# Altium PCB NetTieLibSample.PcbDoc
Units mm, origin at the board's own origin, x right, y up, seen from the top; angles counter-clockwise.
Board outline 97.5 x 65 mm, 6 copper layers (Top Layer, MidLayer1, MidLayer2, MidLayer3, MidLayer4, Bottom Layer); 20 components, 22 nets, 56 pads, 0 vias.
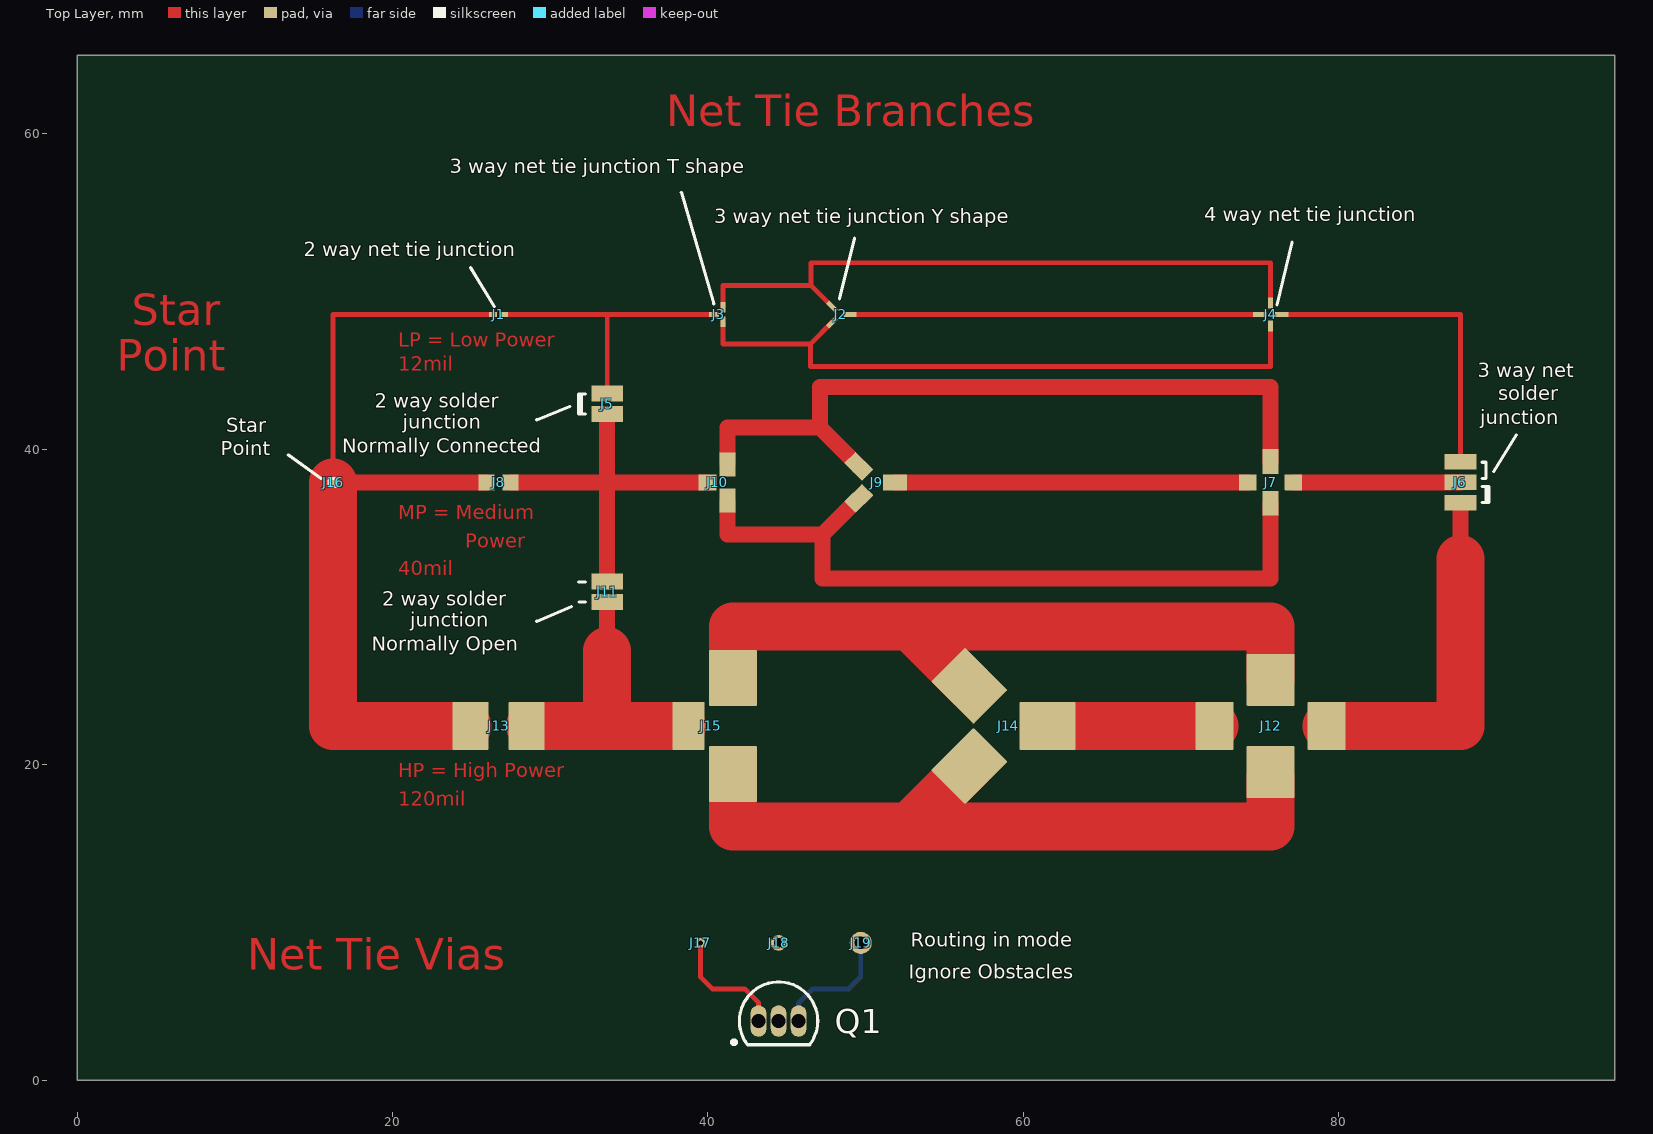
[diagram p0: Top Layer view]
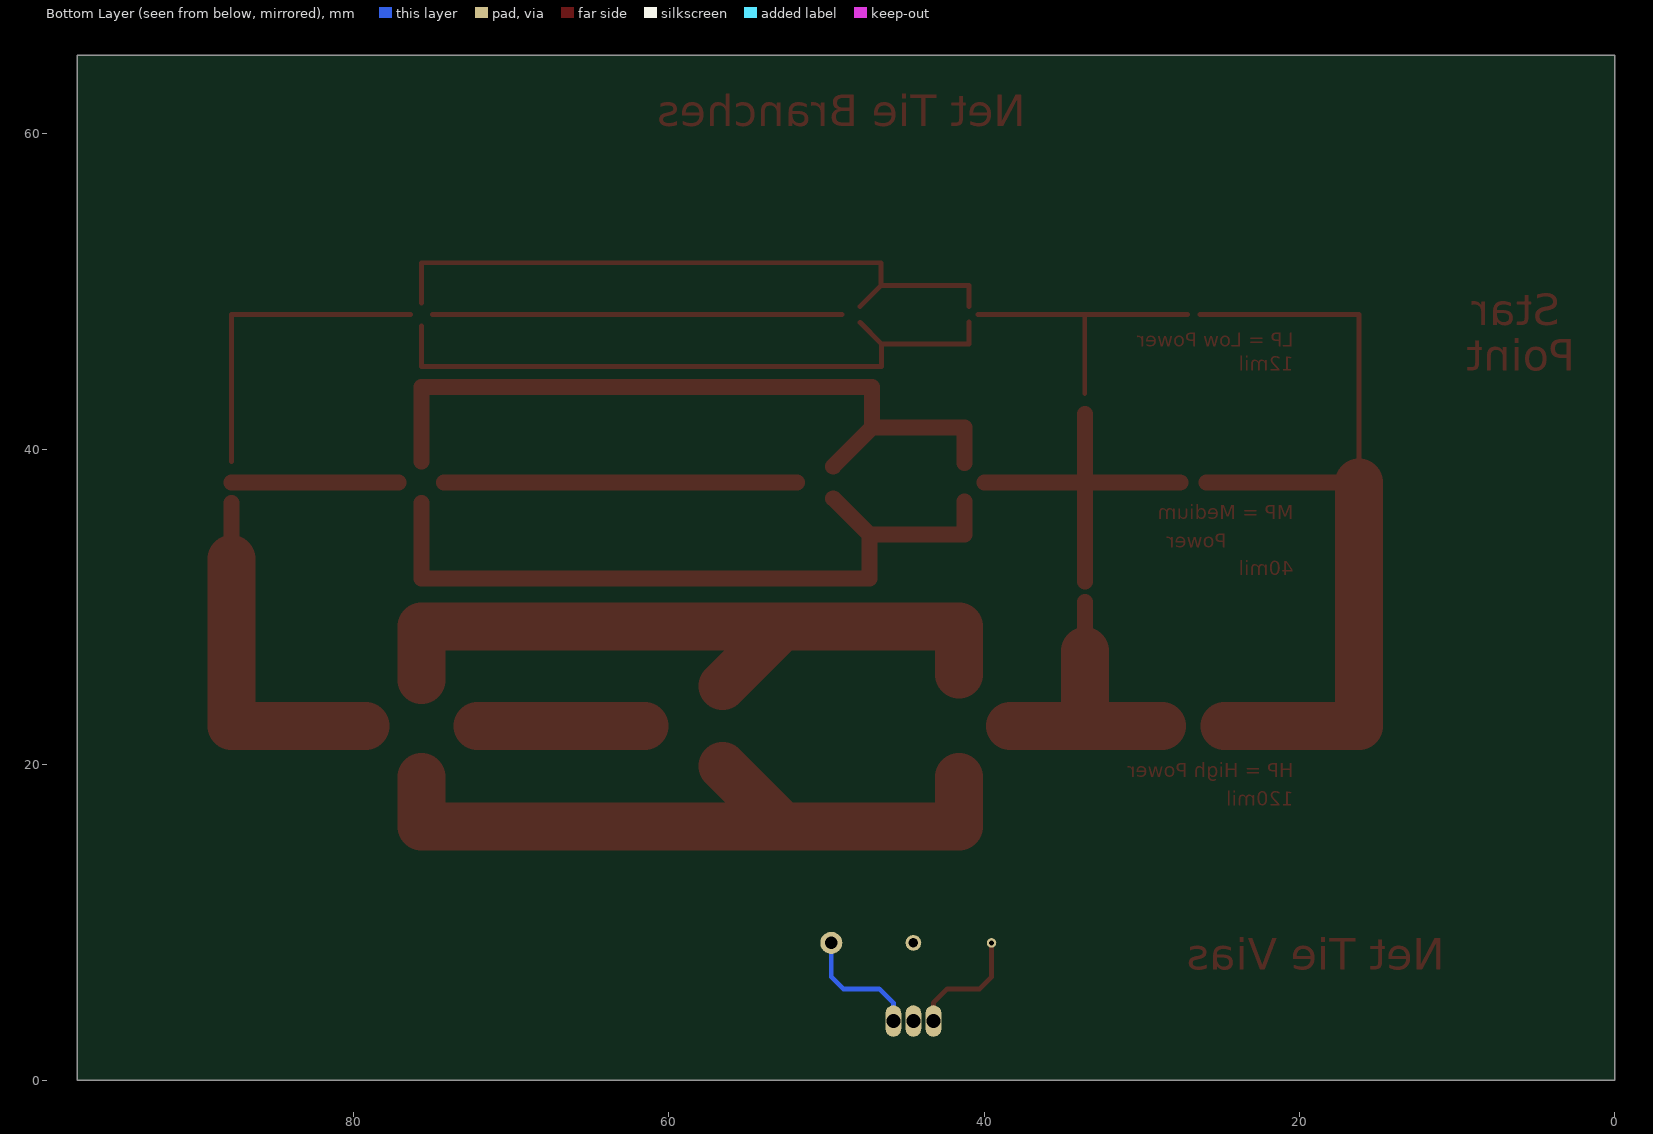
[diagram p1: Bottom Layer view, seen from below]
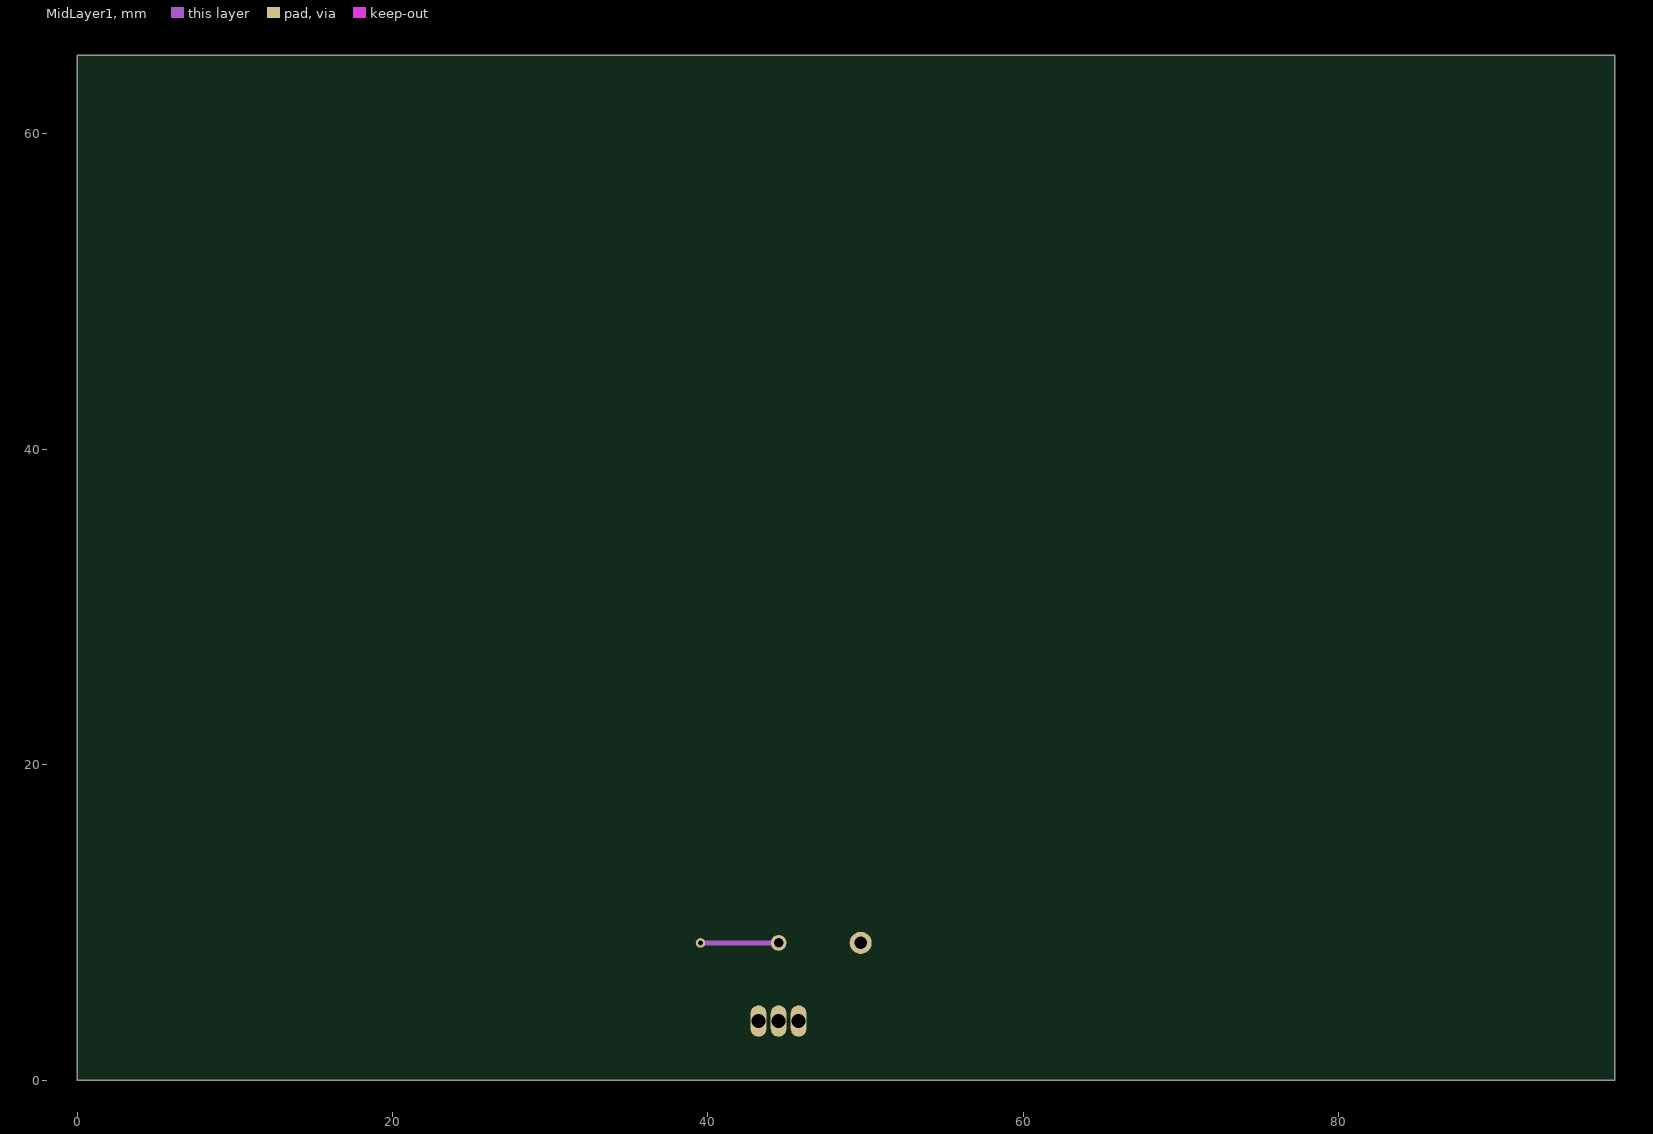
[diagram p2: MidLayer1]
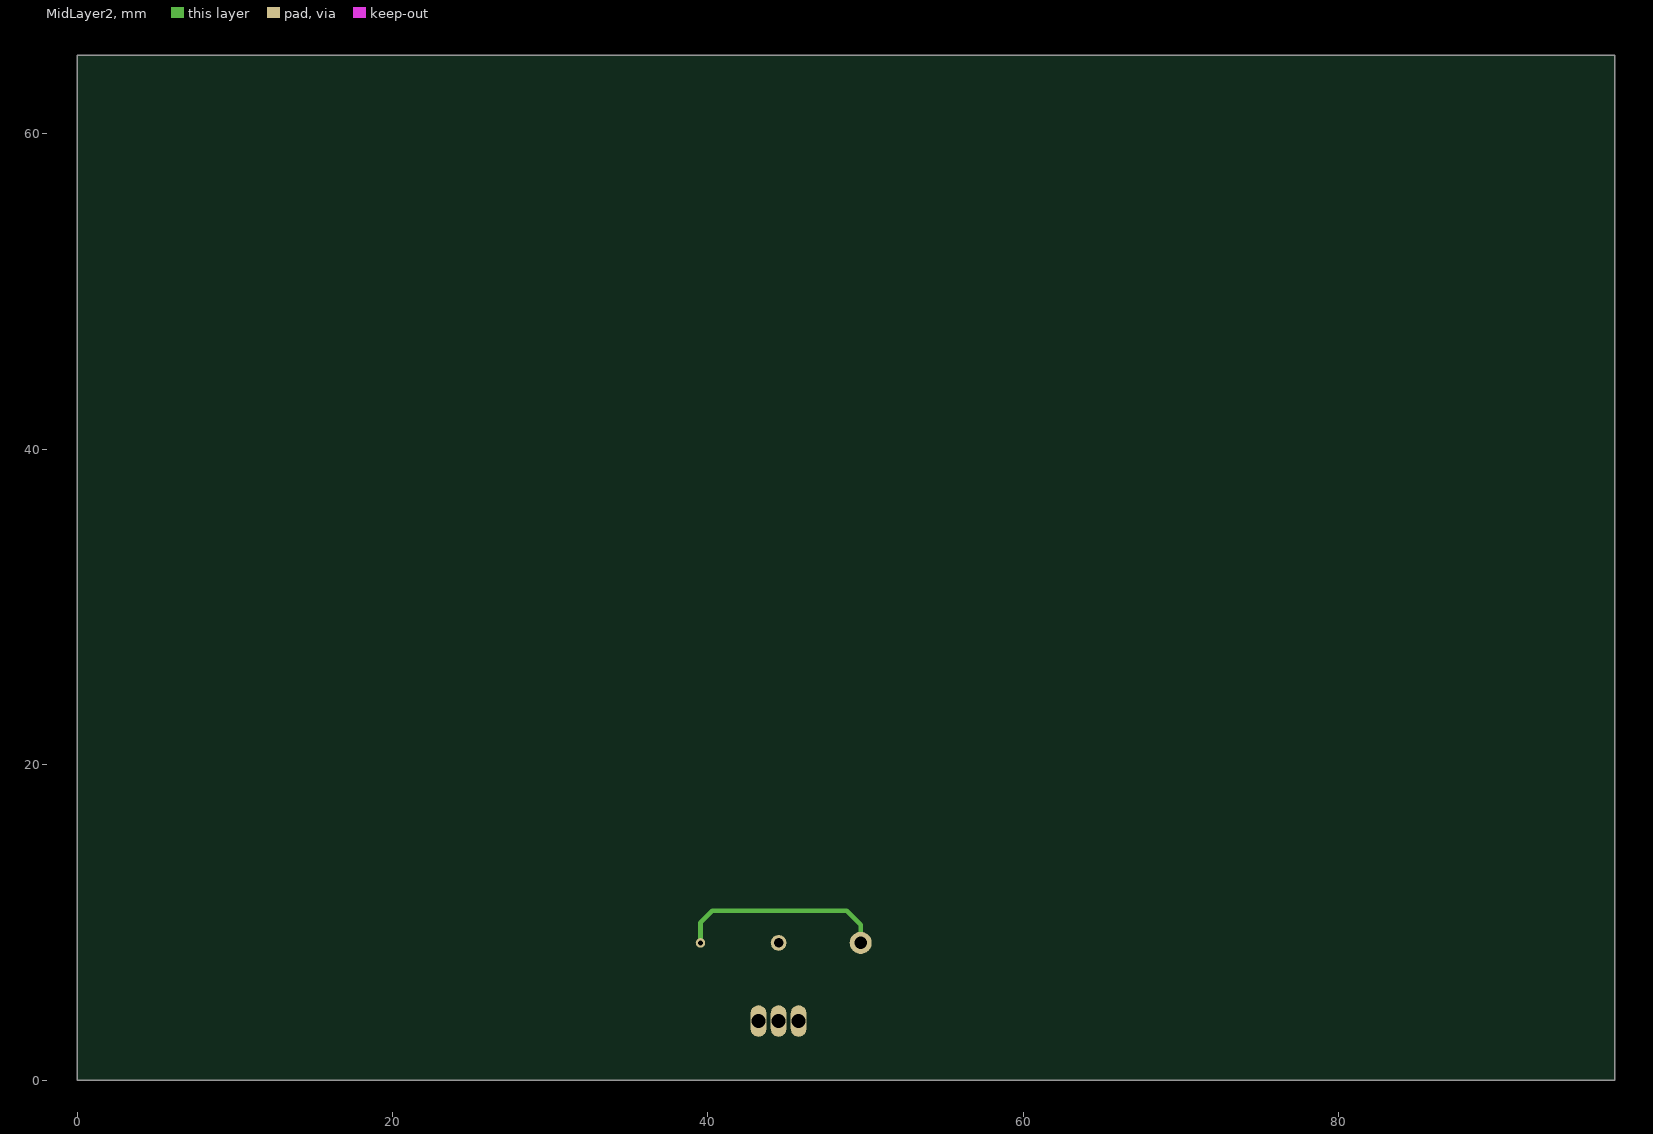
[diagram p3: MidLayer2]
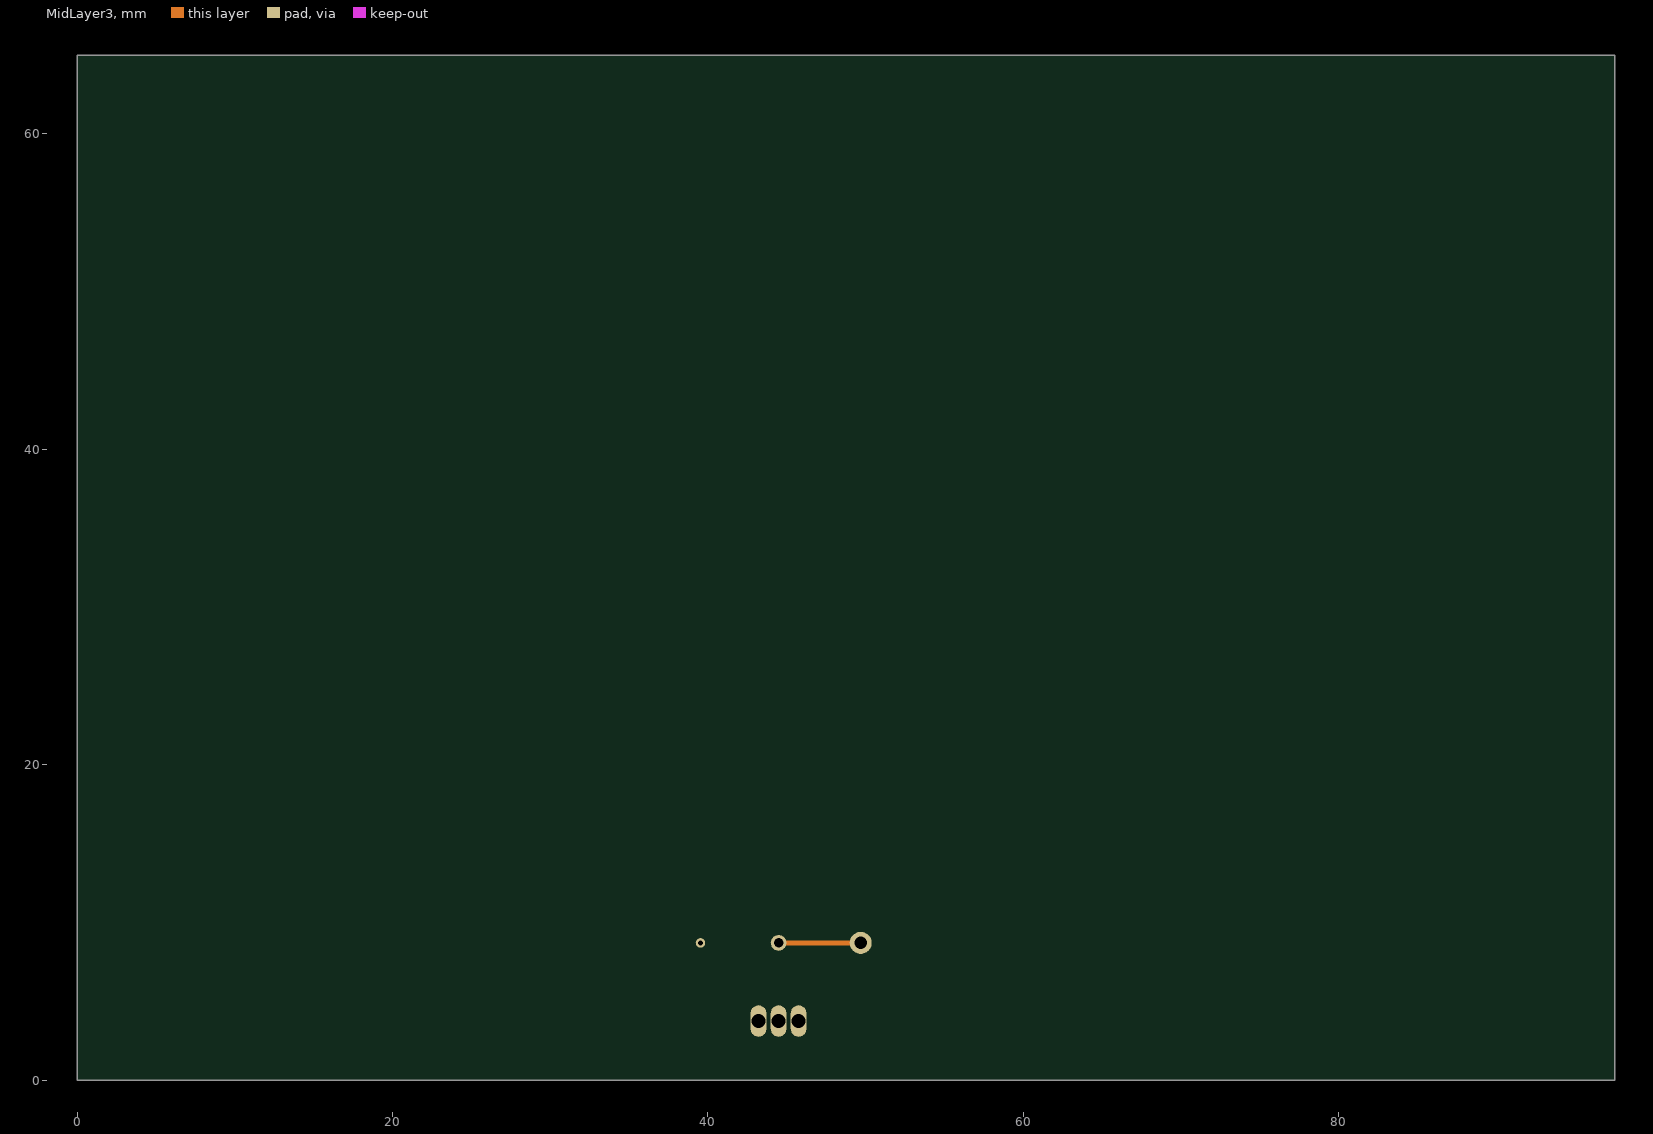
[diagram p4: MidLayer3]
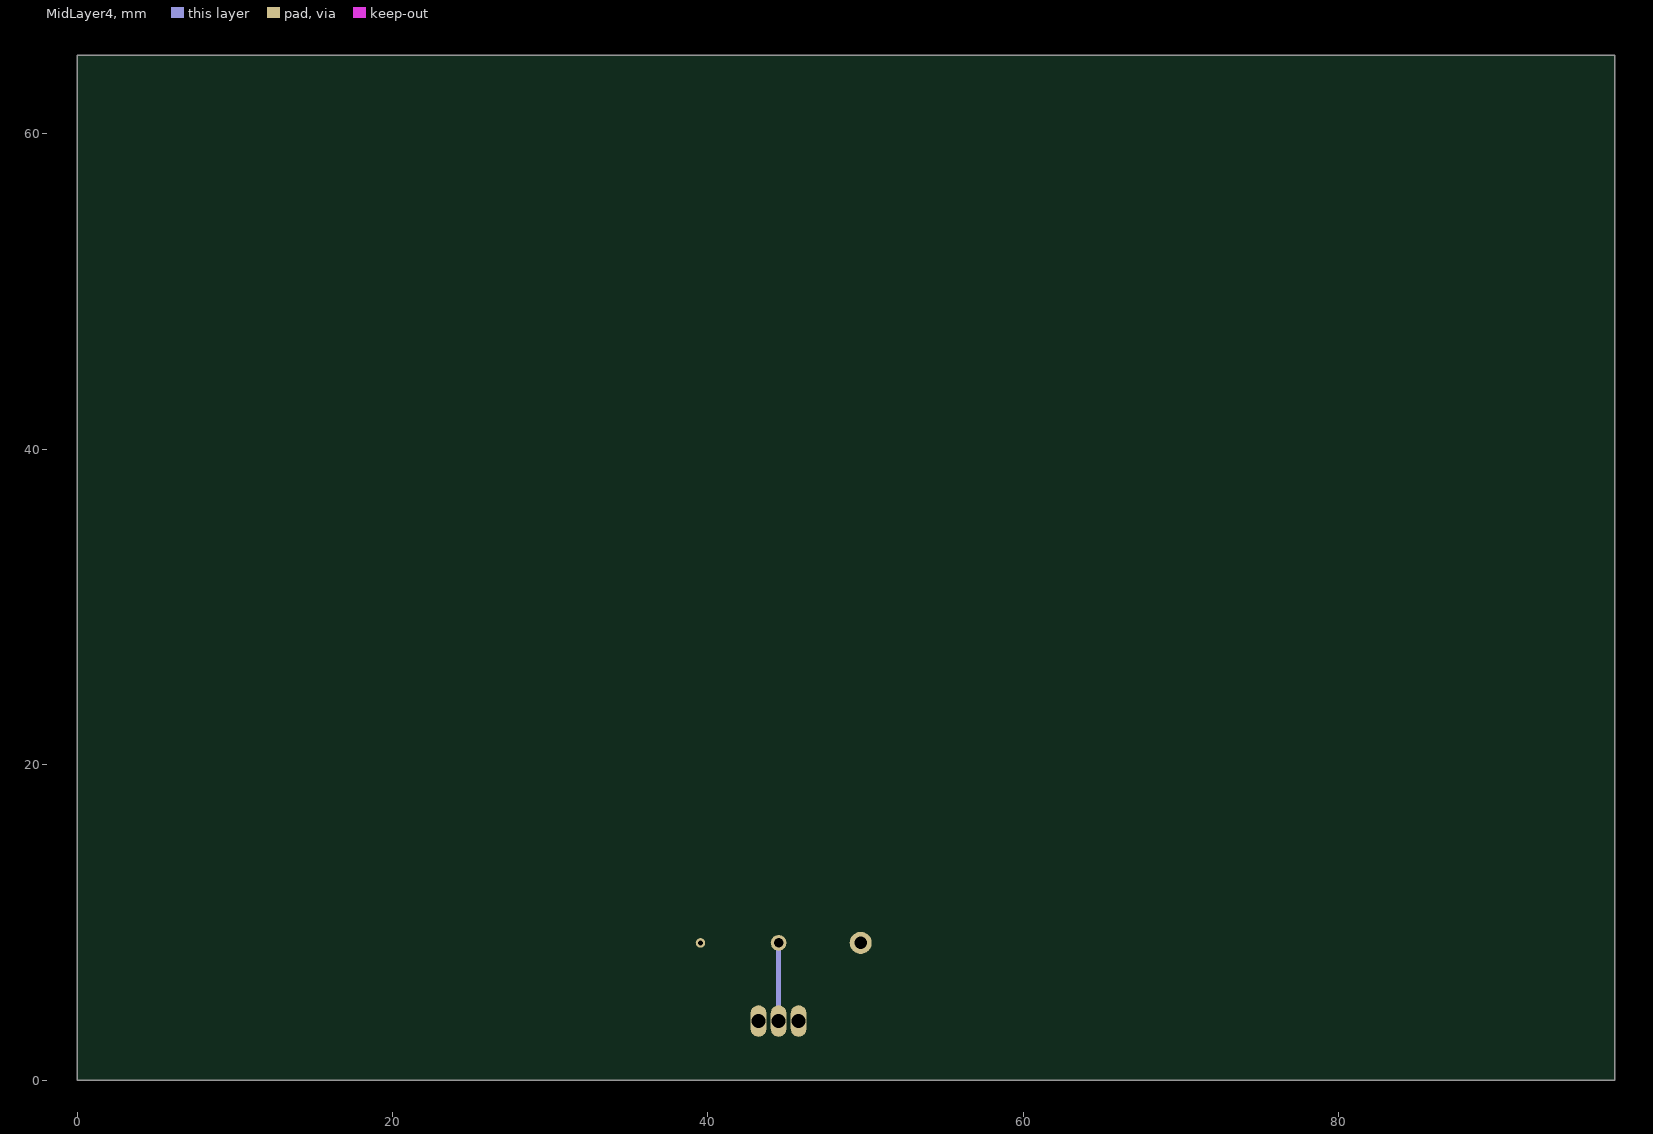
[diagram p5: MidLayer4]

## Layer stack, top to bottom
Top Layer: signal copper 0.0356
Dielectric: core 0.32, FR-4, Dk 4.8
MidLayer1: signal copper 0.0356
Dielectric: prepreg 0.32, FR-4, Dk 4.8
MidLayer2: signal copper 0.0356
Dielectric: core 0.32, FR-4, Dk 4.8
MidLayer3: signal copper 0.0356
Dielectric: prepreg 0.32, FR-4, Dk 4.8
MidLayer4: signal copper 0.0356
Dielectric: core 0.32, FR-4, Dk 4.8
Bottom Layer: signal copper 0.0356

## Board outline
0,0 97.5,0 97.5,65 0,65

## Design rules (kind name [scope] priority, off if disabled: settings)
Clearance [All] p1: gap=0.2
ComponentClearance ComponentClearance_NetTie [((ObjectKind = 'Component') And (ComponentType = 'Net Tie')) Or (Footprint = 'StarPoint') Or (Footprint like 'NetTieVia*')] p1: gap=-3.81 collisioncheckmode=3 verticalgap=-3.81 showdistances=FALSE
ComponentClearance [All] p2: gap=0.254 collisioncheckmode=3 verticalgap=0.1 showdistances=TRUE
FabricationTestPointUsage TestPointUsage [All] p1: valid=0 allowmultiple=FALSE
FabricationTestpoint Testpoint [All] p1: side=3 testpointundercomponent=TRUE minsize=1.016 maxsize=2.54 preferedsize=1.524 minholesize=0 maxholesize=1.016 preferedholesize=0.813 testpointgrid=0.025 allowsidetop=TRUE allowsidebottom=TRUE usegrid=TRUE gridtolerance=0
HoleToHoleClearance HoleToHoleClearance_NetTieVia [InPadClass('NetTieVias') vs InPadClass('NetTieVias')] p1: gap=0 allowstackedmicrovias=TRUE
HoleToHoleClearance [All] p2: gap=0.254 allowstackedmicrovias=TRUE
MinimumSolderMaskSliver [All] p1: minsoldermaskwidth=0
PolygonConnect [All] p1: connectstyle=Direct reliefconductorwidth=0.254 reliefentries=4 polygonreliefangle="90 Angle" airgapwidth=0.254
RoutingTopology RoutingTopology_GND_Star [InNet('GND')] p1: topology=Starburst
RoutingTopology [All] p2: topology=Shortest
RoutingVias [All] p1: holewidth=0.3 width=0.61 viastyle="Through Hole" minholewidth=0.279 minwidth=0.61 maxholewidth=0.305 maxwidth=0.711
SilkToSilkClearance [All] p1: silktosilkclearance=0.102
SilkToSolderMaskClearance SilkscreenOverComponentPads_JTAG1 [(IsPad) And (isthrupin and InComponent('JTAG1')) vs isarc and onsilkscreen] p1: minsilkscreentomaskgap=0 clearancetoexposedcopper=TRUE
SolderMaskExpansion [All] p1: expansion=0.102
Width "Schematic Width Constraint_2" [InNetClass('HP')] p1: maxlimit=3.048 minlimit=0.305 preferedwidth=3.048
Width "Schematic Width Constraint_1" [InNetClass('MP')] p2: maxlimit=3.048 minlimit=0.305 preferedwidth=1.016
Width "Schematic Width Constraint" [InNetClass('LP')] p3: maxlimit=3.048 minlimit=0.305 preferedwidth=0.305
Width [All] p4: maxlimit=3.048 minlimit=0.2 preferedwidth=0.3
20 further rules are at their usual default settings.

## Classes and differential pairs
net class MP: NETMP1 NETMP2 NETMP3 NETMP4 NETMP5
net class LP: NETLP1 NETLP2 NETLP3 NETLP4 NETLP5
net class HP: NETHP1 NETHP2 NETHP3 NETHP4 NETHP5
pad class NetTieVias: J17-1 J17-2 J17-3 J18-1 J18-2 J18-3 J19-1 J19-2 J19-3

## Components (designator, comment, footprint, x,y, rotation, side; value= is the part's Value field where it differs from the comment)
J1 "2 way net tie junction" 2WAY_LP 26.724,48.553 r0 top net-tie
J2 "3 way net tie junction Y shape" 3WAYY_LP 48.318,48.553 r180 top net-tie
J3 "3 way net tie junction T shape" 3WAYT_LP 40.948,48.553 r0 top net-tie
J4 "4 way net tie junction" 4WAY_LP 75.67,48.553 r90 top net-tie
J5 "2 way net solder junction - Normally Connected" 2WAYSOLDER_NC 33.607,42.889 r270 top
J6 "3 way net solder junction" 3WAYSOLDER 87.709,37.911 r90 top
J7 "4 way net tie junction" 4WAY_MP 75.67,37.911 r0 top net-tie
J8 "2 way net tie junction" 2WAY_MP 26.724,37.911 r0 top net-tie
J9 "3 way net tie junction Y shape" 3WAYY_MP 50.575,37.911 r180 top net-tie
J10 "3 way net tie junction T shape" 3WAYT_MP 41.234,37.911 r0 top net-tie
J11 "2 way net solder junction - Normally Open" 2WAYSOLDER_NO 33.607,30.977 r270 top
J12 "4 way net tie junction" 4WAY_HP 75.67,22.468 r0 top net-tie
J13 "2 way net tie junction" 2WAY_HP 26.724,22.468 r0 top net-tie
J14 "3 way net tie junction Y shape" 3WAYY_HP 58.22,22.468 r180 top net-tie
J15 "3 way net tie junction T shape" 3WAYT_HP 41.583,22.468 r0 top net-tie
J16 "Star point for definition of /  starburst topology" STARPOINT 16.234,37.911 r90 top
J17 "Net Tie Via" NETTIEVIA03 39.522,8.712 r90 top net-tie
J18 "Net Tie Via" NETTIEVIA06 44.475,8.712 r90 top net-tie
J19 "Net Tie Via" NETTIEVIA08 49.682,8.712 r90 top net-tie
Q1 "2N3904" TO-92A 44.475,3.759 r270 top

## Footprints (in the part's own frame and the unit in brackets; to place one, negate y for a bottom-side part, rotate by r counter-clockwise, add the part's x,y. Pads: shape width x height; smd on the part's side, far side on the other; paste and mask are expansions set on the pad)
2WAY_HP [mil] "2 way high power power net tie junction"
  rrect5% 90x120 smd paste-100: 1(-70,0) 2(70,0)
2WAY_LP [mil] "2 way low power net tie junction"
  rrect5% 20x12 smd paste-100: 1(-14,0) 2(14,0)
2WAY_MP [mil] "2 way medium power net tie junction"
  rrect5% 40x40 smd paste-100: 1(-30,0) 2(30,0)
2WAYSOLDER_NC [mm] "2 way net solder junction - Normally Connected"
  rect 1x2 smd paste-2.032: 1(-0.65,0) 2(0.65,0)
  silkscreen extent -0.62,-1.8 0.65,-1.37, body extent -0.5,-1.15 0.5,1.15, height 0.8
2WAYSOLDER_NO [mm] "2 way net solder junction - Normally Open"
  rect 1x2 smd paste-1.016: 1(-0.65,0) 2(0.65,0)
  silkscreen extent -0.62,-1.8 0.65,-1.37
3WAYSOLDER [mm] "3 way net solder junction"
  rect 1x2 smd paste-2.032: 1(-1.3,0) 2(0,0) 3(1.3,0)
  silkscreen extent -1.27,-1.8 1.27,-1.37, body extent -1.15,-1.15 -0.15,1.15, height 0.8
3WAYT_HP [mil] "3 way high power power net tie T shape junction"
  rrect5% 80x120 smd paste-100: 1(-111,0)
  rrect5% 120x140 smd paste-100: 2(0,120) 3(0,-120)
3WAYT_LP [mil] "3 way low power net tie T shape junction"
  rrect5% 25x12 smd paste-100: 1(-22,0)
  rrect5% 12x26 smd paste-100: 2(0,18) 3(0,-18)
3WAYT_MP [mil] "3 way medium power net tie T shape junction"
  rrect5% 45x40 smd paste-100: 1(-50,0)
  rrect5% 40x60 smd paste-100: 2(0,45) 3(0,-45)
3WAYY_HP [mil] "3 way high power power net tie Y shape junction"
  rrect5% 140x120 smd paste-100: 1(-130,0)
  rrect5% 150x120 smd rot 45 paste-100: 2(65,100)
  rrect5% 150x120 smd rot 135 paste-100: 3(65,-100)
3WAYY_LP [mil] "3 way low power net tie Y shape junction"
  rrect5% 32x12 smd paste-100: 1(-27,0)
  rrect5% 32x12 smd rot 45 paste-100: 2(18,20)
  rrect5% 32x12 smd rot 135 paste-100: 3(18,-20)
3WAYY_MP [mil] "3 way medium power net tie Y shape junction"
  rrect5% 60x40 smd paste-100: 1(-50,0)
  rrect5% 62x40 smd rot 45 paste-100: 2(40,40)
  rrect5% 62x40 smd rot 135 paste-100: 3(40,-40)
4WAY_HP [mil] "4 way high power power net tie junction"
  rrect5% 95x120 smd paste-100: 1(-140,0) 4(140,0)
  rrect5% 120x130 smd paste-100: 2(0,115) 3(0,-115)
4WAY_LP [mil] "4 way low power net tie junction"
  rrect5% 28x12 smd paste-100: 1(-29,0) 4(29,0)
  rrect5% 12x35 smd paste-100: 2(0,27) 3(0,-27)
4WAY_MP [mil] "4 way medium power net tie junction"
  rrect5% 44x40 smd paste-100: 1(-57,0) 4(57,0)
  rrect5% 40x62 smd paste-100: 2(0,52) 3(0,-52)
NETTIEVIA03 [mm] "Net Tie Via 0.3mm"
  round 0.6 hole 0.3 paste-2.032: 1(0,0) 2(0,0) 3(0,0)
NETTIEVIA06 [mm] "Net Tie Via 0.6mm"
  round 1 hole 0.6 paste-2.032: 1(0,0) 2(0,0) 3(0,0)
NETTIEVIA08 [mm] "Net Tie Via 0.8mm"
  round 1.4 hole 0.8 paste-2.032: 1(0,0) 2(0,0) 3(0,0)
STARPOINT [mil] "Star point for definition of starburst topology"
  rrect5% 20x20 smd paste-20: 1(0,0)
  silkscreen extent -10,-10 10,10
TO-92A [mm] "TO, Flat Index; 3 In-Line, Axial Leads; Body Dia. 4.5mm; Leads 0.51 x 0.48 mm (max)"
  oval 2x1 hole 0.9: 1(0,-1.27) 2(0,0) 3(0,1.27)
  silkscreen extent -2.48,-2.95 1.5,2.48, body extent -2.5,-2.5 1.5,2.5, height 6.86

## Part data
J1 J8 J13: library part 2way
J2 J9 J14: library part 3wayY
J3 J10 J15: library part 3wayT
J4 J7 J12: library part 4way
J5: library part 2waySolderNC
J6: library part 3waySolder
J11: library part 2waySolderNO
J16: library part StarPoint, "Star point for definition of starburst topology"
J17 J18 J19: library part NetTieVia
Q1: "NPN General Purpose Amplifier"

## Nets (pads, with @x,y where several pads share a name; then routed paths per layer and width w, separated by ;. In a path a pad name is that pad's centre, name@x,y a point inside that pad or via, vN(x,y) a via of type N, cw(c..) or ccw(c..) an arc to the next point about the centre after c; other vN are vias at no path point)
GND: J1.1 J8.1 J13.1 J16.1 | length 54.3
  Top Layer w0.305: J16.1 16.234,48.553 J1.1@26.321,48.553
  Top Layer w1.016: J16.1 J8.1@25.889,37.911
  Top Layer w3.048: J16.1 16.234,22.468 J13.1@24.746,22.468
LAYERBOT: J19.2 Q1.3 | length 7.9
  Bottom Layer w0.3: Q1.3 45.745,4.902 46.634,5.791 48.92,5.791 49.682,6.553 J19.2
LAYERMID1: J17.2 J18.2 | length 5
  MidLayer1 w0.3: J17.2 J18.2
LAYERMID2: J17.3 J19.3 | length 13.3
  MidLayer2 w0.3: J17.3 39.522,9.982 40.284,10.744 48.793,10.744 49.682,9.855 J19.3
LAYERMID3: J18.1 J19.1 | length 5.2
  MidLayer3 w0.3: J18.1 J19.1
LAYERMID4: J18.3 Q1.2 | length 5
  MidLayer4 w0.3: Q1.2 J18.3
LAYERTOP: J17.1 Q1.1 | length 7.7
  Top Layer w0.3: J17.1 39.522,6.553 40.284,5.791 42.316,5.791 43.205,4.902 Q1.1
NETHP1: J11.2 J13.2 J15.1 | length 17.5
  Top Layer w1.016: 33.607,27.217 J11.2
  Top Layer w3.048: J13.2@28.702,22.468 33.607,22.468 ; 33.607,27.217 33.607,22.468 ; J15.1@38.335,22.468 33.607,22.468
NETHP2: J12.2 J14.3 J15.2 | length 45.8
  Top Layer w3.048: J15.2@41.583,25.716 41.583,28.767 52.81,28.767 ; J14.3 52.81,28.767 ; J12.2 75.67,28.767 52.81,28.767
NETHP3: J12.3 J14.2 J15.3 | length 45.8
  Top Layer w3.048: J15.3@41.583,19.22 41.583,16.096 52.737,16.096 ; J14.2 52.737,16.096 ; J12.3@75.67,19.22 75.67,16.096 52.737,16.096
NETHP4: J12.1 J14.1 | length 10.6
  Top Layer w3.048: J14.1 J12.1
NETHP5: J6.1 J12.4 | length 22.6
  Top Layer w1.016: 87.709,33.059 J6.1
  Top Layer w3.048: J12.4 87.709,22.468 87.709,33.059
NETLP1: J1.2 J3.1 J5.1 | length 18.3
  Top Layer w0.305: J1.2 33.607,48.553 ; J5.1 33.607,48.553 ; J3.1 33.607,48.553
NETLP2: J2.3 J3.2 J4.4 | length 41.9
  Top Layer w0.305: J3.2@40.948,49.058 40.948,50.386 46.536,50.386 ; J2.3 46.536,50.386 ; J4.4 75.67,51.834 46.536,51.834 46.536,50.386
NETLP3: J2.2 J3.3 J4.1 | length 42.1
  Top Layer w0.305: J3.3 40.948,46.678 46.493,46.678 ; J2.2 46.493,46.678 ; J4.1 75.67,45.255 46.493,45.255 46.493,46.678
NETLP4: J2.1 J4.2 | length 26
  Top Layer w0.305: J2.1 J4.2
NETLP5: J4.3 J6.3 | length 20.7
  Top Layer w0.305: J4.3 87.709,48.553 J6.3
NETMP1: J5.2 J8.2 J10.1 J11.1 | length 23
  Top Layer w1.016: J8.2@27.559,37.911 33.607,37.911 ; J11.1 33.607,37.911 ; J5.2 33.607,37.911 ; J10.1 33.607,37.911
NETMP2: J7.2 J9.3 J10.2 | length 47.5
  Top Layer w1.016: J10.2@41.234,39.127 41.234,41.391 47.095,41.391 ; J9.3 47.095,41.391 ; J7.2 75.67,43.96 47.095,43.96 47.095,41.391
NETMP3: J7.3 J9.2 J10.3 | length 47.3
  Top Layer w1.016: J10.3@41.234,36.695 41.234,34.609 47.273,34.609 ; J9.2 47.273,34.609 ; J7.3 75.67,31.819 47.273,31.819 47.273,34.609
NETMP4: J7.1 J9.1 | length 22.4
  Top Layer w1.016: J9.1 J7.1
NETMP5: J6.2 J7.4 | length 10.6
  Top Layer w1.016: J7.4 J6.2

## Other copper
Top Layer:
  text "Net Tie Branches" at 37.338,60.477 h2
  text "Star" at 3.48,47.879 h2
  text "LP = Low Power" at 20.378,46.496 h0.9
  text "Point" at 2.5,45 h2
  text "12mil" at 20.378,44.972 h0.9
  text "MP = Medium" at 20.378,35.578 h0.9
  text "Power" at 24.62,33.749 h0.9
  text "40mil" at 20.378,32.018 h0.9
  text "HP = High Power" at 20.378,19.22 h0.9
  text "120mil" at 20.378,17.417 h0.9
  text "Net Tie Vias" at 10.795,7.01 h2

## Silkscreen, mask and mechanical layers (free items; w line width, h text height)
Top Overlay:
  lines w0.2: 13.393,39.642 15.45,38.169 ; 24.938,51.538 26.448,49.065 ; 29.141,29.101 31.351,30.041 ; 29.141,41.877 31.249,42.715 ; 38.309,56.298 40.368,49.218 ; 48.343,49.548 49.283,53.383 ; 76.08,49.167 77.02,53.129 ; 89.821,38.6 91.244,40.912
  text "3 way net tie junction T shape" at 23.622,57.506 h0.9
  text "4 way net tie junction" at 71.457,54.475 h0.9
  text "3 way net tie junction Y shape" at 40.393,54.348 h0.9
  text "2 way net tie junction" at 14.383,52.24 h0.9
  text "3 way net" at 88.805,44.569 h0.9
  text "solder" at 90.101,43.122 h0.9
  text "2 way solder" at 18.879,42.639 h0.9
  text "junction" at 88.958,41.598 h0.9
  text "junction" at 20.657,41.318 h0.9
  text "Star" at 9.456,41.09 h0.9
  text "Normally Connected" at 16.796,39.794 h0.9
  text "Point" at 9.1,39.616 h0.9
  text "2 way solder" at 19.336,30.091 h0.9
  text "junction" at 21.114,28.771 h0.9
  text "Normally Open" at 18.669,27.229 h0.9
  text "Routing in mode" at 52.857,8.458 h0.9
  text "Ignore Obstacles" at 52.73,6.426 h0.9
Outline:
  the board outline again, w0.2